# Altium PCB VatorMonitor.PcbDoc (part 2 of 2)
Units mil, origin at the board's own origin, x right, y up, seen from the top; angles counter-clockwise.
Board outline 6790 x 5680 mil, 2 copper layers (TopLayer, BottomLayer); 187 components, 167 nets, 777 pads, 179 vias.
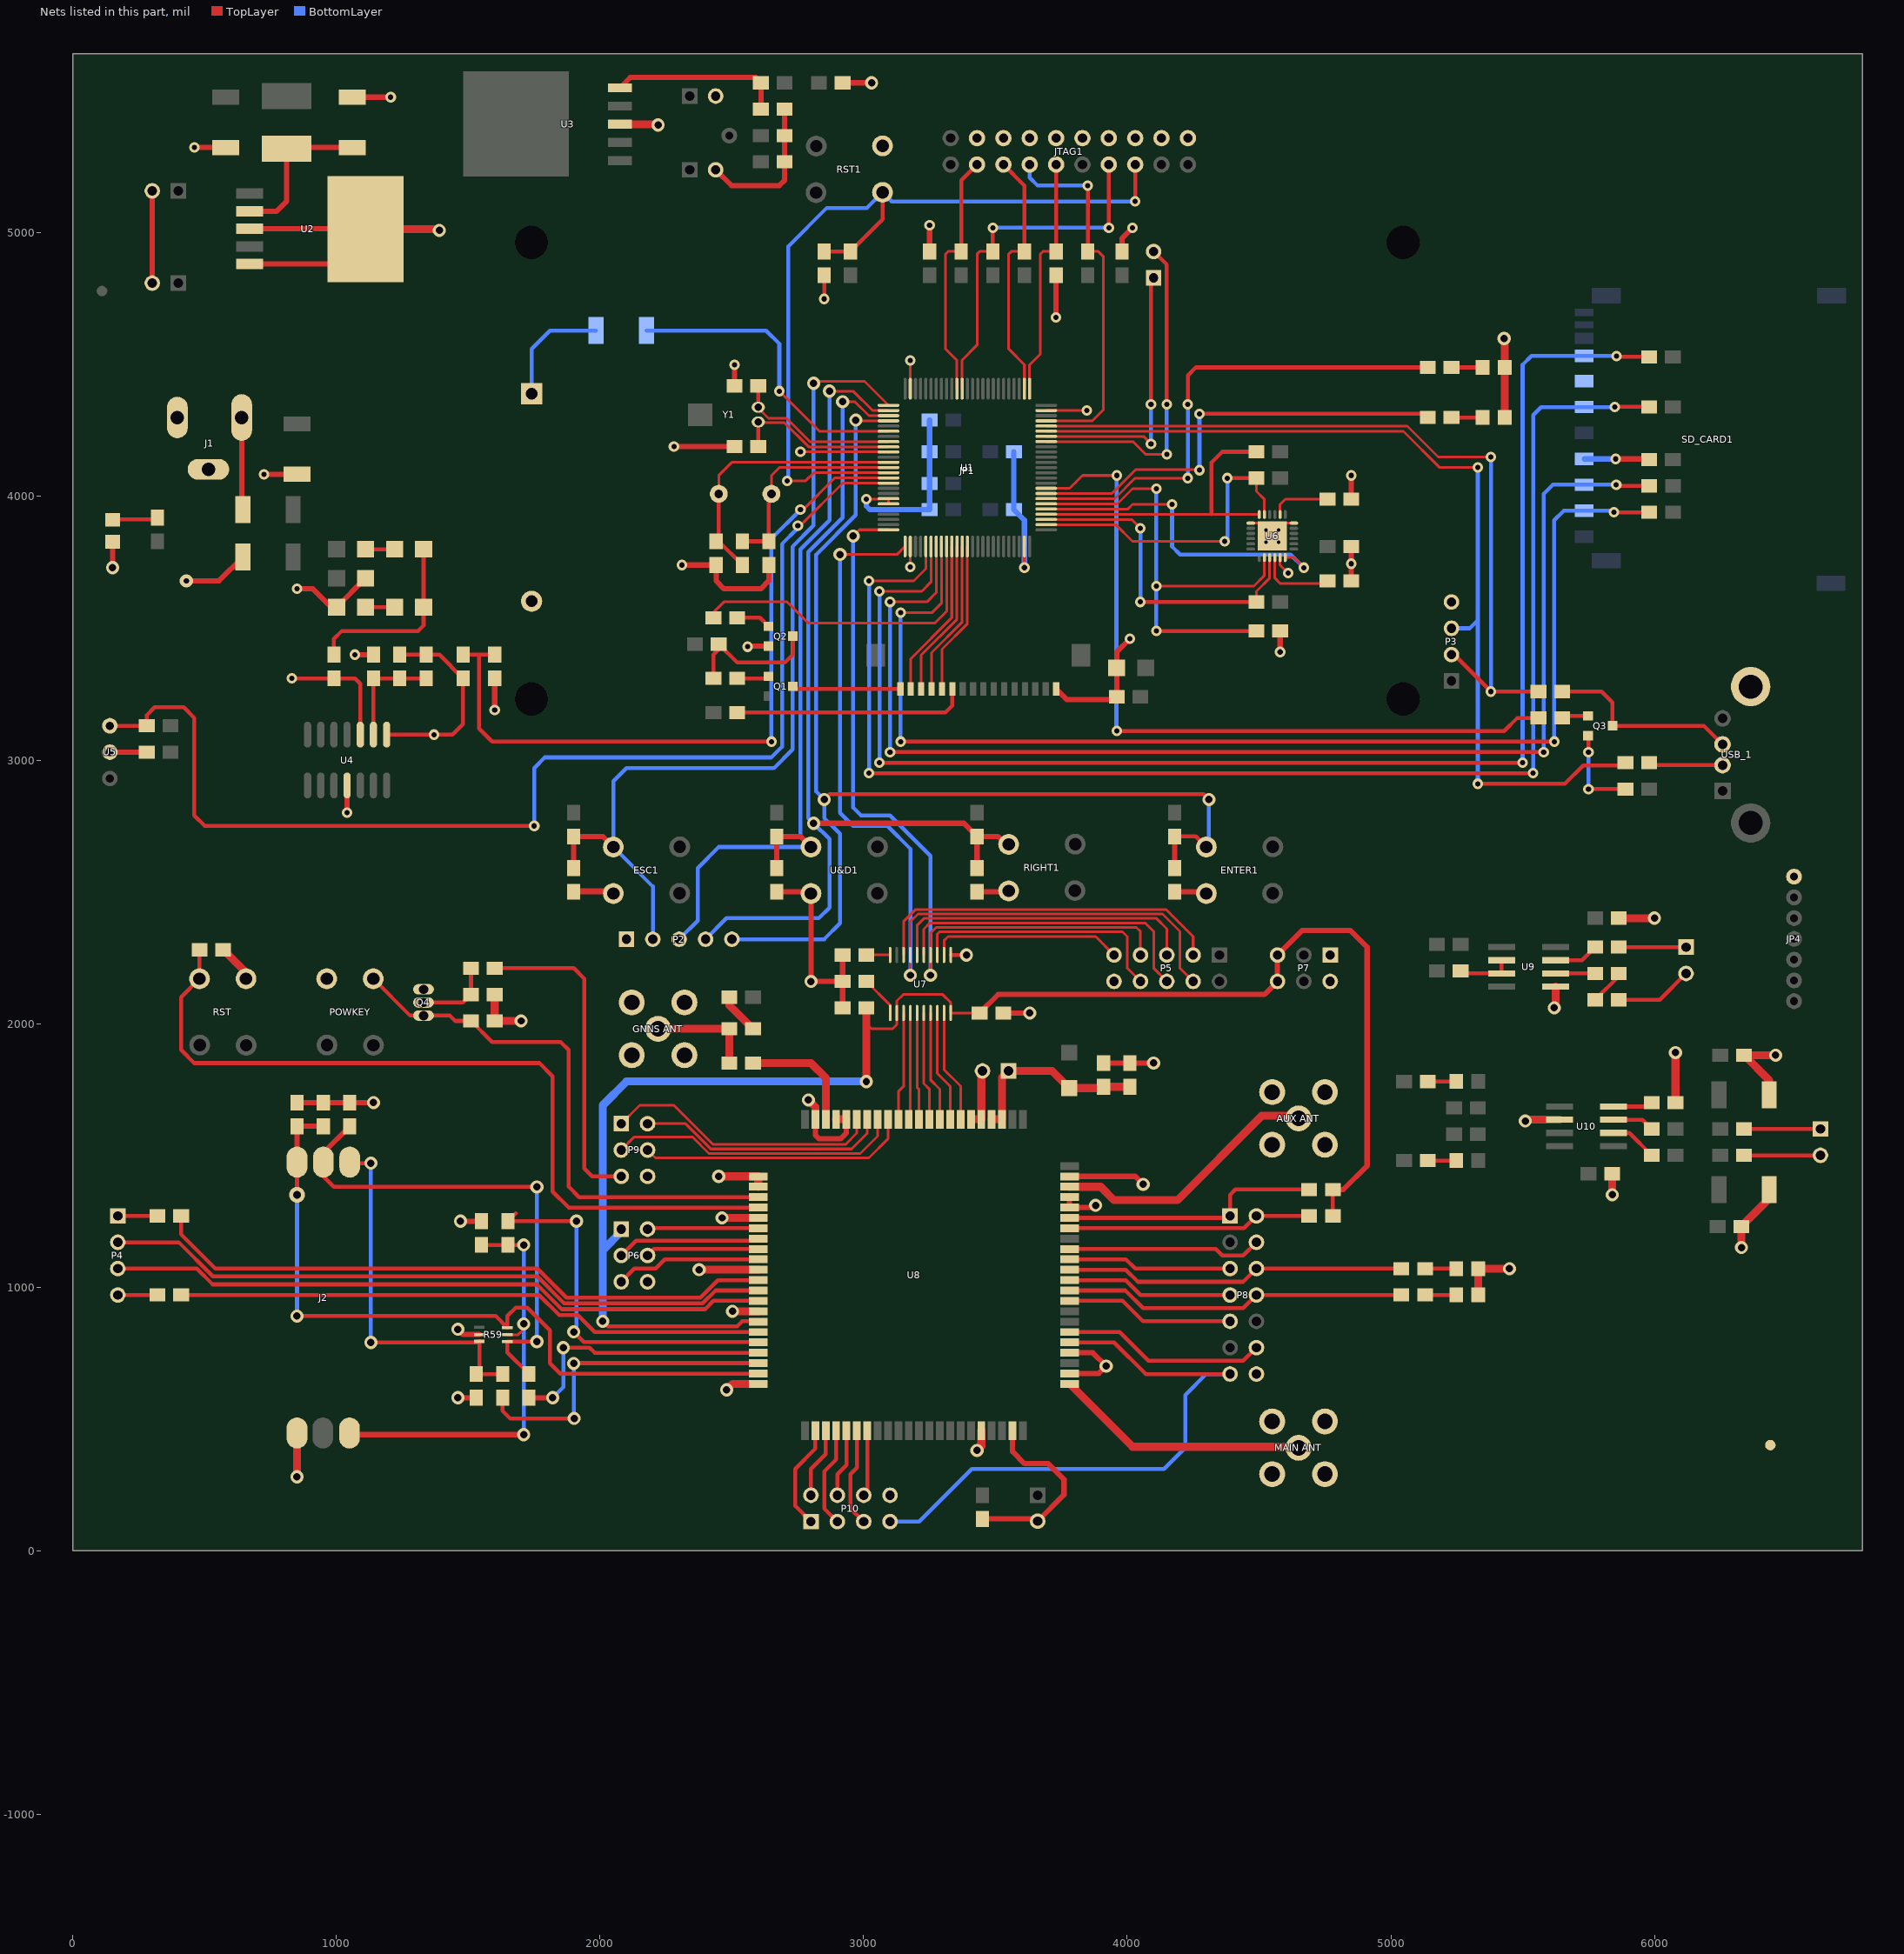
[diagram p2: the nets of this part, all layers, seen from the top]

## Via types
v1: diameter 40, hole 20, TopLayer to BottomLayer, 102 vias
v2: diameter 50, hole 28, TopLayer to BottomLayer, 66 vias
v3: diameter 25.98, hole 12.99, TopLayer to BottomLayer, 4 vias
v4: diameter 196.85, hole 118.11, TopLayer to BottomLayer, 4 vias
v5: diameter 50, hole 20, TopLayer to BottomLayer, 3 vias

## Nets (pads, with @x,y where several pads share a name; then routed paths per layer and width w, separated by ;. In a path a pad name is that pad's centre, name@x,y a point inside that pad or via, vN(x,y) a via of type N, cw(c..) or ccw(c..) an arc to the next point about the centre after c; other vN are vias at no path point) (continued)
GND: "AUX ANT.1" "AUX ANT.2" "AUX ANT.4" "AUX ANT.5" "GNNS ANT.1" "GNNS ANT.2" "GNNS ANT.4" "GNNS ANT.5" "MAIN ANT.1" "MAIN ANT.2" "MAIN ANT.4" "MAIN ANT.5" BAT1.2 C1.2 C2.2 C3.2 C4.2 C5.2 C6.2 C7.2 C8.2 C9.2 C10.1 C11.1 C12.1 C13.1 C14.2 C15.2 C16.2 C17.2 C18.2 C19.2 C20.2 C21.2 C22.2 C24.1 C25.1 C26.1 C27.1 C28.1 C29.1 C30.2 C31.1 C32.1 C33.1 C34.2 C35.2 C36.2 C38.2 C39.2 C40.2 C41.2 C42.2 C43.1 C44.1 C45.1 C46.2 C47.2 C48.1 C49.1 C50.1 C51.2 D3.1 D4.1 D5.1 D6.1 D7.2 D8.2 D9.2 D11.1 D13.1 ENTER1.2 ESC1.2 J1.2 J1.3 J2.5 JP1.1 JP4.7 JTAG1.4 JTAG1.6 JTAG1.8 JTAG1.10 JTAG1.12 JTAG1.14 JTAG1.16 JTAG1.18 JTAG1.20 LED1.2 LED2.2 P2.1 P3.4 P5.10 P6.6 P7.1 P7.2 P8.14 P9.6 P10.8 pad.1 POWKEY.2 Q2.1 Q4.1 R9.2 R12.1 R18.1 R20.1 R36.2 R42.1 R43.1 R44.1 R45.2 R49.1 R59.2 R67.2 RIGHT1.2 RST1.2 RST.1 SD_CARD1.3 SD_CARD1.6 U1.10 U1.19 U1.20 U1.27 U1.49 U1.74 U1.99 U2.3 U2.5 U2.6 U3.3 U4.11 U5.2 U6.1 U6.11 U6.18 U6.25 U7.11 U8.1 U8.2 U8.5 U8.10 U8.14 U8.37 U8.40 U8.41 U8.43 U8.57 U8.58 U8.60 U8.64 U8.65 U8.77 U8.78 U8.80 U8.81 U9.5 U10.2 U&D1.2 USB_1.5 | length 15913.5
  TopLayer w10: v1(2760,4170) 3093.11,4170 U1.10@3094.06,4169.06 ; v1(3010,3990) 3092.17,3990 U1.19@3094.06,3991.89 U1.20@3094.06,3972.2 ; v1(3176.73,3733.27) U1.27@3176.73,3810.79 ; U1.99@3176.73,4409.21 v1(3176.73,4516.73) ; v1(3609.8,3730.2) U1.49@3609.8,3810.79 ; U1.74@3692.48,4326.54 v1(3846.54,4326.54) ; U6.1@4468.31,3899.21 4500.79,3899.21 v3(4526.38,3873.62) U6.25@4550,3850 ; v3(4526.38,3826.38) U6.25@4550,3850 ; v3(4573.62,3826.38) U6.25@4550,3850 ; U6.11@4579.53,3768.31 4579.53,3740.47 v1(4610,3710) ; U6.18@4631.69,3899.21 4599.21,3899.21 U6.25@4550,3850
  TopLayer w15: v1(2560,3430) v1@2562.6,3432.6 ; v1(2850,4750) C14.2@2850,4840 ; U7.11@3330.32,2260.47 3389.53,2260.47 v2(3390,2260)
  TopLayer w20: U5.2@140,3030 C28.1@280,3030 ; v2(150,3730) D7.2@150,3828 ; C16.2@300.79,4810 C15.2@300.79,5160 ; v5(430,3680) 554.53,3680 D4.1@644.53,3770 ; v1(460,5324.53) D5.1@580,5324.53 ; U2.5@670,4882.28 977.28,4882.28 U2.6@1110,5015 1108.86,5016.14 U2.3@670,5016.14 ; v1(724.53,4084.53) D6.1@850,4084.53 ; C41.2@850,1700 C42.2@950,1700 C43.1@1050,1700 v2(1140,1700) ; v1(850,3650) 910,3650 980,3580 R18.1@1000,3580 1000.24,3580 C21.2@1110.24,3690 ; v1(1040,2800) U4.11@1040,2903.54 ; D3.1@1060,5515.47 v1(1205.47,5515.47) ; v1(1070,3400) R20.1@1140,3400 ; v2(1460,580) C45.1@1530,580 ; v2(1460,840) 1480,820 R59.2@1542,820 ; v2(1470,1250) C47.2@1550,1250 ; v1(1600,3190) C22.2@1600,3310 ; C24.1@1900,2500 2043.62,2500 ESC1.2@2050,2493.62 ; C24.1@1902.44,2502.44 ESC1.2@2043.46,2502.44 ; v1(2280,4190) C11.1@2510,4190 ; v1(2310,3740) C12.1@2440,3740 2440,3680 2470,3650 2610,3650 2640,3680 C13.1@2640,3740 ; C17.2@2438.42,5240 2498.42,5180 2680,5180 2700,5200 C19.2@2700,5270 R42.1@2700,5370 R43.1@2700,5470 ; C10.1@2510,4420 v1(2510,4500) ; v1@2562.6,3432.6 Q2.1@2638.74,3432.6 ; C25.1@2670,2500 2795.93,2500 U&D1.2@2798.37,2502.44 ; U&D1.2@2800,2493.62 v2(2800,2160) R44.1@2920,2160 ; U8.80@2816.54,1636.53 2816.54,1576.47 2830,1563 2913,1563 2934.65,1584.65 U8.77@2934.65,1636.53 ; C34.2@2920,2060 R44.1@2920,2160 ; R45.2@2920,2260 R44.1@2920,2160 ; C20.2@2920,5570 v2(3030,5570) ; R12.1@3250,4930 v1(3250,5030) ; C26.1@3430,2500 3550.84,2500 RIGHT1.2@3553.28,2502.44 ; C44.1@3450,120 3651.57,120 C46.2@3660,111.58 3760,211.58 3760,270 3700,330 3610,330 3564.57,375.43 U8.40@3564.57,455 ; C33.1@3530,2040 v2(3630,2040) ; JP1.1@3730,3270 3770,3230 3950,3230 C2.2@3960,3240 3960,3349.76 C1.2@3959.76,3350 3959.76,3409.76 v1(4010,3460) ; v1(3730,4680) R9.2@3730,4840 ; U8.41@3781.1,671.97 3891.97,671.97 v2(3920,700) 3869.29,750.71 U8.43@3781.1,750.71 ; U8.58@3781.1,1341.26 U8.57@3781.1,1301.89 3871.89,1301.89 v2(3880,1310) ; U8.60@3781.1,1420 4030,1420 v2(4060,1390) ; C38.2@3910,1850 C36.2@4010,1850 v2(4100,1850) ; C3.2@3980,4930 3980,4980 v1(4020,5020) ; C27.1@4180,2500 4305.75,2500 ENTER1.2@4308.19,2502.44 ; v1(4580,3410) R36.2@4580,3490 ; C31.1@4850,3680 v1(4850,3745) C29.1@4850,3810 ; C30.2@4850,3990 v1(4850,4080) ; v1(5852.8,4142.8) 5977.2,4142.8 C32.1@5980,4140
  TopLayer w30: C40.2@570,2280 656.38,2193.62 RST.1@656.38,2170 ; v2(850,280) J2.5@850,446 ; U2.6@1110,5015 1385,5015 v2(1390,5010) ; R49.1@1600,2110 C39.2@1600,2010 v2(1700,2010) ; U3.3@2075,5413 2217,5413 v2(2220,5410) ; v2(2375.67,1065.67) U8.10@2600,1065.67 ; v2(2450,1420) U8.1@2600,1420 U8.2@2600,1380.63 ; v2(2462.52,1262.52) U8.5@2600,1262.52 ; v2(2480,610) 2502.6,632.6 U8.81@2600,632.6 ; v2(2501.81,908.19) U8.14@2600,908.19 ; v2(2790,1710) 2816.54,1683.47 U8.80@2816.54,1636.53 ; U8.78@2895.28,1636.53 U8.77@2934.65,1636.53 ; U8.65@3407.09,1636.53 U8.64@3446.46,1636.53 3446.46,1815.67 C35.2@3450.79,1820 ; v2(3430,380) 3446.46,396.46 U8.37@3446.46,455 ; D9.2@5332,970 D8.2@5332,1070 v2(5450,1070) ; v2(5430,4600) 5432,4598 LED1.2@5432,4490 LED2.2@5432,4300 ; v2(5510,1630) 5515,1635 U10.2@5639.64,1635 ; v2(5620,2060) 5624.72,2064.72 U9.5@5624.72,2140 ; v2(5840,1350) C50.1@5840,1430 ; C48.1@5865,2400 v2(6000,2400) ; R67.2@6080,1700 v2(6080,1890) ; v2(6330,1150) C51.2@6330,1230 6435.47,1335.47 D13.1@6435.47,1370 ; D11.1@6435.47,1730 6435.47,1784.53 C49.1@6340,1880 v2(6460,1880)
  BottomLayer w15: v1@720,4080 v1(724.53,4084.53) ; v1(4610,3710) v1@4620,3700
  BottomLayer w20: v1@460,5320 v1(460,5324.53) ; v1(3010,3990) 3010,3963.78 3023.78,3950 C9.2@3250,3950 C8.2@3250,4050 C4.2@3250,4170 C7.2@3250,4290 ; C5.2@3570,4170 C6.2@3570,3950 3609.8,3910.2 v1(3609.8,3730.2) ; SD_CARD1.3@5733.71,4142.8 v1(5852.8,4142.8)
  other v3: 4573.62,3873.62
GPIO41: P8.5 U8.52 | length 623.4
  TopLayer w15: U8.52@3781.1,1105.04 3994.96,1105.04 4030,1070 P8.5@4390,1070
GPIO43: P8.7 U8.50 | length 632.2
  TopLayer w15: U8.50@3781.1,1026.3 3993.7,1026.3 4050,970 P8.7@4390,970
IRDATA: R32.2 U1.16 U5.1 | length 4534.3
  TopLayer w10: v1(2750,3890) 2760,3890 2920.94,4050.94 U1.16@3094.06,4050.94
  TopLayer w15: U5.1@140,3130 R32.2@280,3130 280,3170 310,3200 420,3200 460,3160 460,2790 500,2750 v1(1750,2750)
  BottomLayer w15: v1(1750,2750) 1750,2970 1790,3010 2650,3010 2690,3050 2690,3820 2750,3880 v1(2750,3890)
ISINK: P8.12 U8.45 | length 774.9
  TopLayer w15: U8.45@3781.1,829.45 3970.55,829.45 4080,720 4440,720 P8.12@4490,770
JTCK: JTAG1.9 R9.1 U1.76 | length 921.7
  TopLayer w10: U1.76@3629.49,4409.21 3629.49,4500 3670,4540.51 3670,4920 3680,4930 R9.1@3730,4930
  TopLayer w15: R9.1@3730,4930 JTAG1.9@3730,5260
JTDI: JTAG1.5 R6.1 U1.77 | length 962.8
  TopLayer w10: U1.77@3609.8,4409.21 3609.8,4500.2 3550,4560 3550,4920 3560,4930 R6.1@3610,4930
  TopLayer w15: JTAG1.5@3530,5260 3610,5180 R6.1@3610,4930
JTDO: JTAG1.13 R8.1 U1.89 | length 1368.3
  TopLayer w10: U1.89@3373.58,4409.21 3373.58,4518.22 3430,4574.64 3430,4920 3440,4930 R8.1@3490,4930
  TopLayer w15: R8.1@3490,4930 v1(3490,5020) ; v1(3930,5020) JTAG1.13@3930,5260
  BottomLayer w15: v1(3490,5020) v1(3930,5020)
JTMS: JTAG1.7 R7.1 U1.72 | length 1416
  TopLayer w10: U1.72@3692.48,4287.17 3867.17,4287.17 3910,4330 3910,4910 3890,4930 R7.1@3850,4930
  TopLayer w15: R7.1@3850,4930 v1(3850,5180)
  BottomLayer w15: JTAG1.7@3630,5260 3630,5210 3660,5180 v1(3850,5180)
JTRST: JTAG1.3 R5.1 U1.90 | length 948
  TopLayer w10: U1.90@3353.9,4409.21 3353.9,4516.1 3310,4560 3310,4920 3320,4930 R5.1@3370,4930
  TopLayer w15: R5.1@3370,4930 3370,5200 JTAG1.3@3430,5260
KEY1: C24.2 ESC1.1 P2.2 R26.2 U1.1 | length 3426.1
  TopLayer w10: v2(2810,4430) 2817,4437 3003.28,4437 U1.1@3094.06,4346.22
  TopLayer w20: C24.2@1900,2590 R26.2@1900,2710 2010,2710 ESC1.1@2050,2670
  BottomLayer w15: P2.2@2200,2320 2200,2520 ESC1.1@2050,2670 2050,2920 2100,2970 2660,2970 2730,3040 2730,3810 2810,3890 v2(2810,4430)
KEY2: C25.2 P2.3 R27.2 U1.2 U&D1.1 | length 3075.3
  TopLayer w10: v2(2870,4400) 2960,4400 3033.46,4326.54 U1.2@3094.06,4326.54
  TopLayer w20: C25.2@2670,2590 R27.2@2670,2710 2760,2710 U&D1.1@2800,2670
  BottomLayer w15: P2.3@2300,2320 2370,2390 2370,2590 2450,2670 U&D1.1@2800,2670 2760,2710 2760,3800 2870,3910 v2(2870,4400)
KEY3: C26.2 P2.4 R28.2 RIGHT1.1 U1.3 | length 3620
  TopLayer w10: v2(2920,4360) 2966.66,4360 3019.81,4306.85 U1.3@3094.06,4306.85
  TopLayer w20: v2(2810,2760) 3380,2760 R28.2@3430,2710 ; C26.2@3430,2590 R28.2@3430,2710 ; RIGHT1.1@3550,2670 3510,2710 R28.2@3430,2710
  BottomLayer w15: P2.4@2400,2320 2480,2400 2830,2400 2870,2440 2870,2700 v2(2810,2760) 2790,2780 2790,3790 2920,3920 v2(2920,4360)
KEY4: C27.2 ENTER1.1 P2.5 R29.2 U1.4 | length 4492.4
  TopLayer w10: v2(2970,4290) 2975.67,4290 2972.83,4287.17 U1.4@3094.06,4287.17
  TopLayer w15: v2(2850,2850) 2870,2870 4290,2870 v2(4310,2850) ; R29.2@4180,2710 4260,2710 ENTER1.1@4300,2670
  TopLayer w20: C27.2@4180,2590 R29.2@4180,2710
  BottomLayer w15: P2.5@2500,2320 2850,2320 2910,2380 2910,2720 2850,2780 v2(2850,2850) 2820,2880 2820,3780 2970,3930 v2(2970,4290) ; ENTER1.1@4300,2670 4310,2680 v2(4310,2850)
LCD_BL: R4.2 U1.34 | length 1218.9
  TopLayer w10: R4.2@2430,3540 2430,3560 2470,3600 2710,3600 2790,3520 3270,3520 3314.53,3564.53 U1.34@3314.53,3810.79
LCD_CS: JP1.15 U1.35 | length 605.2
  TopLayer w10: JP1.15@3178.82,3270 3178.82,3384.61 3334.21,3540 U1.35@3334.21,3810.79
LCD_DC: JP1.13 U1.37 | length 588.8
  TopLayer w10: JP1.13@3257.56,3270 3257.56,3407.56 3373.58,3523.58 U1.37@3373.58,3810.79
LCD_RST: JP1.14 U1.36 | length 597
  TopLayer w10: JP1.14@3218.19,3270 3218.19,3398.19 3353.9,3533.9 U1.36@3353.9,3810.79
LCD_WR: JP1.12 U1.38 | length 580.7
  TopLayer w10: JP1.12@3296.93,3270 3296.93,3420.97 3393.27,3517.31 U1.38@3393.27,3810.79
LED1: R30.2 U1.57 | length 1882.3
  TopLayer w10: U1.57@3692.48,3991.89 3951.89,3991.89 4030,4070 v1(4230,4070)
  TopLayer w15: v1(4230,4350) 4230,4460 4260,4490 R30.2@5140,4490
  BottomLayer w15: v1(4230,4070) v1(4230,4350)
LED2: R31.2 U1.58 | length 1705.6
  TopLayer w10: U1.58@3692.48,4011.57 3941.57,4011.57 4032,4102 4272,4102 v1(4274,4100)
  TopLayer w15: v1(4274,4314) 5126,4314 R31.2@5140,4300
  BottomLayer w15: v1(4274,4100) v1(4274,4314)
M_CTS: P5.8 U7.13 | length 1001.4
  TopLayer w10: U7.13@3279.13,2260.47 3279.13,2339.13 3288,2348 3982,2348 4000,2330 4000,2210 P5.8@4050,2160
M_DCD: P5.5 U7.16 | length 1186.7
  TopLayer w10: U7.16@3202.36,2260.47 3202.36,2372.36 3229,2399 4111,2399 4150,2360 P5.5@4150,2260
M_DTR: P5.3 U7.18 | length 1357.1
  TopLayer w10: U7.18@3151.18,2260.47 3151.18,2387.14 3197.04,2433 4147,2433 4250,2330 P5.3@4250,2260
M_RI: P5.6 U7.15 | length 1203.5
  TopLayer w10: U7.15@3227.95,2260.47 3227.95,2357.95 3252,2382 4068,2382 4100,2350 4100,2210 P5.6@4150,2160
M_RTS: P5.9 U7.12 | length 734.9
  TopLayer w10: U7.12@3304.72,2260.47 3304.72,2314.72 3320,2330 3880,2330 P5.9@3950,2260
M_RXD: P5.7 U1.25 U7.14 | length 3055.3
  TopLayer w10: v2(2960,3850) 2983.78,3873.78 U1.25@3094.06,3873.78 ; v2@3253.54,2186.46 U7.14@3253.54,2260.47 3253.54,2343.54 3275,2365 4035,2365 4050,2350 P5.7@4050,2260
  BottomLayer w15: v2(2960,3850) 2960,2820 2990,2790 3100,2790 3253.54,2636.46 v2(3253.54,2183.23)
M_TXD: P5.4 U1.26 U7.17 | length 3520.2
  TopLayer w10: v2(2910,3780) 3126.26,3780 U1.26@3157.05,3810.79 ; v2(3176.77,2183.23) U7.17@3176.77,2260.47 3176.77,2386.77 3206,2416 4134,2416 4200,2350 4200,2210 P5.4@4250,2160
  BottomLayer w15: v2(2910,3780) 2910,2800 2960,2750 3090,2750 3176.77,2663.23 v2(3176.77,2183.23)
MPU6000_C\S\: R36.1 U1.56 U6.8 | length 1856.5
  TopLayer w10: U1.56@3692.48,3972.2 3962.2,3972.2 4020,4030 v1(4110,4030) ; v1(4110,3660) 4480,3660 4520.47,3700.47 U6.8@4520.47,3768.31
  TopLayer w15: v1(4110,3490) R36.1@4490,3490
  BottomLayer w15: v1(4110,3490) v1(4110,3660) v1(4110,4030)
MPU6000_CLK: R35.2 U1.52 U6.23 | length 1208.9
  TopLayer w10: U1.52@3692.48,3893.46 3956.54,3893.46 4020,3830 v1(4370,3830) ; R35.2@4490,4070 4490,4020 4520.47,3989.53 U6.23@4520.47,3931.69
  TopLayer w15: v1(4380,4070) R35.2@4490,4070
  BottomLayer w15: v1(4370,3830) 4380,3840 v1(4380,4070)
MPU6000_INT: U1.55 U6.12 | length 1264.6
  TopLayer w10: U1.55@3692.48,3952.52 4002.52,3952.52 4020,3970 v1(4170,3970) ; U6.12@4599.21,3768.31 4631.69,3768.31 v1(4670,3730)
  BottomLayer w15: v1(4170,3970) 4170,3810 4200,3780 4620,3780 v1(4670,3730)
MPU6000_MISO: R33.2 U1.53 U6.9 | length 1280.3
  TopLayer w10: U1.53@3692.48,3913.15 4016.85,3913.15 v1(4050,3880) ; R33.2@4490,3600 4490,3640 4540.16,3690.16 U6.9@4540.16,3768.31
  TopLayer w15: v1(4050,3600) R33.2@4490,3600
  BottomLayer w15: v1(4050,3600) v1(4050,3880)
MPU6000_MOSI: R34.2 U1.54 U6.24 | length 1190.9
  TopLayer w10: U1.54@3692.48,3932.83 4320,3932.83 U6.24@4499.65,3932.83
  TopLayer w15: 4320,3932.83 4320,4130 4360,4170 R34.2@4490,4170
NET: P8.6 R56.1 U8.51 | length 1298.5
  TopLayer w15: U8.51@3781.1,1065.67 3994.33,1065.67 4040,1020 4440,1020 P8.6@4490,1070 R56.1@5040,1070
"NetAUX ANT_3": "AUX ANT.3" U8.59 | length 1026.6
  TopLayer w30: U8.59@3781.1,1380.63 3899.37,1380.63 3950,1330 4190,1330 4510,1650 4640,1650 4650,1640
NetBAT1_1: BAT1.1 D1.1 | length 443.5
  BottomLayer w15: BAT1.1@1740,4390 1740,4560 1810,4630 D1.1@1984.53,4630
NetC23_1: C23.1 R20.2 R21.1 U4.2 | length 413.5
  TopLayer w15: U4.2@1140,3096.46 R20.2@1140,3310 C23.1@1240,3310 R21.1@1340,3310
NetC23_2: C23.2 R16.1 R21.2 U4.1 | length 757.4
  TopLayer w15: U4.1@1190,3096.46 v1(1370,3096.46) 1440,3096.46 1480,3136.46 R16.1@1480,3310 1390,3400 R21.2@1340,3400 C23.2@1240,3400
NetC30_1: C30.1 U6.20 | length 226.8
  TopLayer w10: U6.20@4579.53,3931.69 4579.53,3969.53 4600,3990 C30.1@4760,3990
NetC31_2: C31.2 U6.10 | length 290.8
  TopLayer w10: U6.10@4559.84,3768.31 4559.84,3690.16 4580,3670 4750,3670 C31.2@4760,3680
NetC35_1: C35.1 C36.1 C38.1 R47.2 U8.62 U8.63 | length 722.6
  TopLayer w15: C38.1@3905,1755 C38.1@3910,1760
  TopLayer w30: U8.63@3485.83,1636.53 U8.62@3525.2,1636.53 3525.2,1795.99 C35.1@3549.21,1820 3715,1820 R47.2@3780,1755 C38.1@3905,1755 ; C38.1@3910,1760 C36.1@4010,1760
NetC37_1: "GNNS ANT.3" C37.1 L2.2 | length 400
  TopLayer w30: 2220,1980 L2.2@2490,1980 C37.1@2490,1850
NetC37_2: C37.2 U8.79 | length 456.6
  TopLayer w30: C37.2@2580,1850 2800,1850 2855.9,1794.09 U8.79@2855.9,1636.53
NetC39_1: C39.1 POWKEY.1 Q4.3 U8.3 | length 2107.9
  TopLayer w15: POWKEY.1@1139.21,2170 1279.21,2030 Q4.3@1330,2030 1430,2030 1450,2010 C39.1@1510,2010 1590,1930 1850,1930 1880,1900 1880,1381.26 1920,1341.26 U8.3@2600,1341.26
NetC40_1: C40.1 RST.2 U8.4 | length 3103.5
  TopLayer w15: C40.1@480,2280 RST.2@480,2170 410,2100 410,1900 460,1850 1770,1850 1820,1800 1820,1361.89 1880,1301.89 2446.03,1301.89 2446.16,1302.02 2599.87,1302.02 U8.4@2600,1301.89
NetC43_2: C43.2 J2.2 R54.2 R59.4 | length 1963.2
  TopLayer w15: J2.2@950,1474 950,1420 990,1380 v2(1760,1380) ; R54.2@1730,670 1648,752 R59.4@1648,793 v2(1760,793)
  TopLayer w20: J2.2@950,1474 950,1510 C43.2@1050,1610
  BottomLayer w10: v2(1760,1380) 1760,1384 v2@1767,1391 ; v2@1767,1380 v2@1767,1391 ; v2@1767,1391 1770,1394 1767,1397 v2@1767,1391
  BottomLayer w15: v2(1760,793) 1767,793 1760,800 v2(1760,1380)
NetC45_2: C45.2 J2.3 R55.2 R59.3 | length 1404.3
  TopLayer w10: J2.3@1050,1474 J2.3@1054,1470 ; C45.2@1530,670 C45.2@1542,682 ; R59.3@1538,790 R59.3@1542,794
  TopLayer w15: J2.3@1054,1470 v2(1130,1470) ; v2(1130,790) R59.3@1538,790 ; C45.2@1530,670 R55.2@1630,670 ; C45.2@1542,682 R59.3@1542,794
  BottomLayer w15: v2(1130,790) v2(1130,1470)
NetC47_1: C47.1 J2.7 R57.2 R59.5 | length 1634.2
  TopLayer w10: R59.5@1648,819 1689,819 1710,840 v2(1710,860)
  TopLayer w15: C47.1@1550,1160 R57.2@1650,1160 v2(1710,1160)
  TopLayer w20: J2.7@1049,446 1055,440 v2(1710,440)
  BottomLayer w15: v2(1710,440) v2(1710,860) v2(1710,1160)
NetD2_1: D2.1 J1.1 | length 351.9
  TopLayer w20: J1.1@640,4300 640,3954.53 D2.1@644.53,3950
NetD3_2: D3.2 L1.1 U2.2 | length 557.2
  TopLayer w20: U2.2@670,5083.07 773.07,5083.07 810,5120 L1.1@810,5320 814.53,5324.53 D3.2@1010,5324.53
NetD7_1: D7.1 R17.2 | length 163.8
  TopLayer w15: D7.1@150,3913.81 R17.2@313.82,3913.81
NetD8_1: D8.1 R56.2 | length 118
  TopLayer w15: R56.2@5130,1070 D8.1@5248,1070
NetD9_1: D9.1 R58.2 | length 118
  TopLayer w15: R58.2@5130,970 D9.1@5248,970
NetD10_1: D10.1 R66.1 | length 108
  TopLayer w15: R66.1@5140,1780 D10.1@5248,1780
NetD12_1: D12.1 R72.1 | length 108
  TopLayer w15: R72.1@5140,1480 D12.1@5248,1480
NetJP1_11: JP1.11 R1.1 | length 890.9
  TopLayer w15: R1.1@2520,3180 3310,3180 3336.3,3206.3 JP1.11@3336.3,3270
NetJP1_16: JP1.16 Q1.3 | length 412.3
  TopLayer w15: Q1.3@2731.26,3280 2741.26,3270 JP1.16@3139.45,3270
NetJP7_1: JP7.1 R68.1 | length 290
  TopLayer w15: R68.1@6340,1600 JP7.1@6630,1600
NetJP7_2: JP7.2 R71.1 | length 290
  TopLayer w15: R71.1@6340,1500 JP7.2@6630,1500
NetL2_1: L2.1 R46.1 | length 157.3
  TopLayer w30: R46.1@2490,2100 2490,2070 L2.1@2580,1980
NetLED1_1: LED1.1 R30.1 | length 116.2
  TopLayer w15: R30.1@5230,4490 LED1.1@5346.18,4490
NetLED2_1: LED2.1 R31.1 | length 116.2
  TopLayer w15: R31.1@5230,4300 LED2.1@5346.18,4300
"NetMAIN ANT_3": "MAIN ANT.3" U8.82 | length 969.4
  TopLayer w30: U8.82@3781.1,632.6 4020,393.7 4646.3,393.7 4650,390
NetQ1_2: Q1.2 R3.1 | length 111.3
  TopLayer w15: R3.1@2520,3310 Q1.2@2631.34,3310
NetQ2_2: Q2.2 R4.1 | length 132.2
  TopLayer w15: R4.1@2520,3540 2606.14,3540 Q2.2@2638.74,3507.4
NetQ2_3: Q2.3 R2.1 R3.2 | length 531
  TopLayer w15: R3.2@2430,3310 2430,3400 2450,3420 R2.1@2450,3440 2520,3370 2701.26,3370 2731.26,3400 Q2.3@2731.26,3470
NetQ3_1: Q3.1 R22.2 | length 343.1
  TopLayer w15: Q3.1@5748.74,3092.6 5750,3091.34 v1(5750,3030) ; v1(5750,2890) R22.2@5890,2890
  BottomLayer w15: v1(5750,2890) v1(5750,3030)
NetQ3_2: Q3.2 R23.2 | length 101.8
  TopLayer w15: R23.2@5650,3160 5657.4,3167.4 Q3.2@5748.74,3167.4
NetQ3_3: Q3.3 R25.1 USB_1.3 | length 743.7
  TopLayer w15: R25.1@5650,3260 5800,3260 5841.26,3218.74 Q3.3@5841.26,3130 6187.95,3130 USB_1.3@6258.58,3059.37
NetQ4_2: Q4.2 R48.2 R49.2 | length 292.4
  TopLayer w15: Q4.2@1330,2080 1480,2080 R49.2@1510,2110 R48.2@1510,2210
NetR13_2: R13.2 R14.1 | length 109.8
  TopLayer w15: R13.2@1110.24,3800 R14.1@1220,3800
NetR14_2: R14.2 R15.1 R19.2 | length 710.8
  TopLayer w15: R15.1@990,3400 990,3460 1020,3490 1310,3490 1330.24,3510.24 R19.2@1330.24,3580 R14.2@1330.24,3800
NetR15_2: R15.2 U4.3 | length 461.8
  TopLayer w15: v1(830,3310) R15.2@990,3310 1070,3310 1090,3290 U4.3@1090,3096.46
NetR18_2: R18.2 R19.1 | length 109.8
  TopLayer w15: R18.2@1110.24,3580 R19.1@1220,3580
NetR24_1: R24.1 USB_1.2 | length 282.5
  TopLayer w15: R24.1@5980,2990 5989.37,2980.63 USB_1.2@6258.58,2980.63
NetR41_1: R41.1 R43.2 U3.5 | length 659.4
  TopLayer w20: U3.5@2075,5551 2114,5590 2590,5590 R41.1@2610,5570 R43.2@2610,5470
NetR44_2: R44.2 U7.1 | length 157.3
  TopLayer w10: R44.2@3010,2160 3100,2070 U7.1@3100,2040
NetR45_1: R45.1 U7.20 | length 90.2
  TopLayer w10: R45.1@3010,2260 3010.47,2260.47 U7.20@3100,2260.47
NetR50_2: R50.2 U8.11 | length 2386.9
  TopLayer w15: R50.2@410,1270 410,1200 540,1070 1762.23,1070 1872.23,960 2380,960 2446.3,1026.3 U8.11@2600,1026.3
NetR53_2: R53.2 U8.16 | length 2261.7
  TopLayer w15: R53.2@419.45,979.45 R53.2@410,970 1768.89,970 1844.89,894 1915.32,894 1980,829.32 2599.87,829.32 U8.16@2600,829.45
NetR61_2: R61.2 U9.7 | length 171
  TopLayer w15: U9.7@5624.72,2240 5725,2240 R61.2@5775,2290
NetR62_2: R62.2 U9.2 U9.3 | length 209.1
  TopLayer w15: R62.2@5265,2200 5275,2190 U9.3@5420,2190 U9.2@5420,2240
NetR64_2: R64.2 R65.1 | length 137.3
  TopLayer w15: R64.2@5775,2090 5865,2180 R65.1@5865,2190
NetR65_2: R65.2 U9.6 | length 150.3
  TopLayer w15: U9.6@5624.72,2190 R65.2@5775,2190
NetR67_1: R67.1 U10.8 | length 151.9
  TopLayer w15: U10.8@5844.36,1685 5975,1685 R67.1@5990,1700
NetR69_1: R69.1 U10.7 | length 160.1
  TopLayer w15: U10.7@5844.36,1635 5955,1635 R69.1@5990,1600
NetR70_1: R70.1 U10.6 | length 180.8
  TopLayer w15: U10.6@5844.36,1585 5905,1585 R70.1@5990,1500
OSC32_IN: C10.2 U1.8 Y1.2 | length 630.9
  TopLayer w10: Y1.2@2600,4336 2639,4297 2707.04,4297 2795.62,4208.43 U1.8@3094.06,4208.43
  TopLayer w15: Y1.2@2600,4336 Y1.2@2600,4339 C10.2@2600,4420
OSC32_OUT: C11.2 U1.9 Y1.1 | length 621.9
  TopLayer w10: Y1.1@2600,4280 2700,4280 2791.26,4188.74 U1.9@3094.06,4188.74
  TopLayer w15: C11.2@2600,4190 Y1.1@2600,4280
OSC_IN: C12.2 R10.2 U1.12 Y2.1 | length 1056.1
  TopLayer w10: Y2.1@2450,4010 2450,4080 2499.69,4129.69 U1.12@3094.06,4129.69
  TopLayer w15: Y2.1@2450,4010 2450,3840 C12.2@2440,3830 2450,3830 R10.2@2540,3740
OSC_OUT: C13.2 R10.1 U1.13 Y2.2 | length 810.6
  TopLayer w10: Y2.2@2650,4010 2650,4080 2680,4110 U1.13@3094.06,4110
  TopLayer w15: R10.1@2540,3830 C13.2@2640,3830 2640,4000 Y2.2@2650,4010
PCM_CLK: P9.1 U8.76 | length 1055.1
  TopLayer w10: P9.1@2080,1620 2150,1690 2280,1690 2429,1541 2931,1541 2974.02,1584.02 U8.76@2974.02,1636.53
PCM_IN: P9.3 U8.74 | length 1110.6
  TopLayer w10: P9.3@2080,1520 2130,1570 2350,1570 2413,1507 2987,1507 3052.76,1572.76 U8.74@3052.76,1636.53
PCM_OUT: P9.4 U8.73 | length 1028.8
  TopLayer w10: P9.4@2180,1520 2210,1490 3020,1490 3092.13,1562.13 U8.73@3092.13,1636.53
PCM_SY: P9.2 U8.75 | length 950.9
  TopLayer w10: P9.2@2180,1620 2324.04,1620 2420.04,1524 2954,1524 3013.39,1583.39 U8.75@3013.39,1636.53
PWR_KEY: P9.5 R48.1 | length 1229
  TopLayer w15: R48.1@1600,2210 1900,2210 1940,2170 1940,1450 1970,1420 P9.5@2080,1420
RESET: C14.1 JTAG1.15 R11.1 RST1.1 U1.14 | length 3217.7
  TopLayer w10: v1(2710,4060) 2780,4060 2810.32,4090.32 U1.14@3094.06,4090.32
  TopLayer w15: C14.1@2850,4930 R11.1@2950,4930 3071.58,5051.58 RST1.1@3071.58,5154.41 ; v1(4030,5120) JTAG1.15@4030,5260
  BottomLayer w15: v1(2710,4060) 2714.5,4064.5 2714.5,4950 2860,5095.5 3012.67,5095.5 RST1.1@3071.58,5154.41 3105.99,5120 v1(4030,5120)
RS232_RX: P1.1 U1.69 | length 1064.5
  TopLayer w10: U1.69@3692.48,4228.11 4061.89,4228.11 v1(4090,4200)
  TopLayer w15: v1(4090,4350) 4090,4820 P1.1@4100,4830
  BottomLayer w15: v1(4090,4200) v1(4090,4350) ; P1.1@4105,4825 P1.1@4120,4840
RS232_TX: P1.2 U1.68 | length 1268.3
  TopLayer w10: U1.68@3692.48,4208.43 4021.57,4208.43 4070,4160 v1(4150,4160)
  TopLayer w15: P1.2@4100,4930 4150,4880 v1(4150,4350)
  BottomLayer w15: v1(4150,4160) v1(4150,4350)
RT+: JP5.2 R64.1 | length 296.4
  TopLayer w15: R64.1@5865,2090 6020,2090 JP5.2@6120,2190
RT-: JP5.1 R61.1 | length 255
  TopLayer w15: R61.1@5865,2290 JP5.1@6120,2290
S_CTS: U7.8 U8.67 | length 423.8
  TopLayer w10: U7.8@3279.13,2040 3279.13,1810.87 3328.35,1761.65 U8.67@3328.35,1636.53
S_DCD: U7.5 U8.70 | length 406.7
  TopLayer w10: U7.5@3202.36,2040 3202.36,1757.64 3210.24,1749.76 U8.70@3210.24,1636.53
S_DTR: U7.3 U8.72 | length 411.6
  TopLayer w10: U8.72@3131.5,1636.53 3131.5,1741.5 3151.18,1761.18 U7.3@3151.18,2040
S_RI: U7.6 U8.69 | length 412.4
  TopLayer w10: U7.6@3227.95,2040 3227.95,1772.05 3249.61,1750.39 U8.69@3249.61,1636.53
S_RTS: U7.9 U8.66 | length 429.6
  TopLayer w10: U7.9@3304.72,2040 3304.72,1825.28 3367.72,1762.28 U8.66@3367.72,1636.53
S_RXD: U7.7 U8.68 | length 418.1
  TopLayer w10: U7.7@3253.54,2040 3253.54,1786.46 3288.98,1751.02 U8.68@3288.98,1636.53
S_TXD: U7.4 U8.71 | length 405.9
  TopLayer w10: U8.71@3170.87,1636.53 3176.77,1642.44 U7.4@3176.77,2040
SCL: P8.2 R52.1 U8.55 | length 928.3
  TopLayer w15: U8.55@3781.1,1223.15 4443.15,1223.15 P8.2@4490,1270 R52.1@4690,1270
SD1_DET: P8.9 U8.48 | length 641
  TopLayer w15: U8.48@3781.1,947.56 3982.44,947.56 4060,870 P8.9@4390,870
SD_CLK: P10.6 U8.26 | length 250.5
  TopLayer w15: P10.6@3000,210 3013.39,223.39 U8.26@3013.39,455
SD_CMD: P10.1 U8.21 | length 401.6
  TopLayer w15: P10.1@2800,110 2740,170 2740,310 2816.54,386.53 U8.21@2816.54,455
SD_DA1: P10.2 U8.22 | length 268.2
  TopLayer w15: P10.2@2800,210 2800,310 2855.9,365.9 U8.22@2855.9,455
SD_DA2: P10.3 U8.23 | length 384.5
  TopLayer w15: U8.23@2895.28,455 2895.28,345.28 2850,300 2850,160 P10.3@2900,110
SD_DA3: P10.4 U8.24 | length 259.4
  TopLayer w15: P10.4@2900,210 2900,290 2934.65,324.65 U8.24@2934.65,455
SD_DA4: P10.5 U8.25 | length 375.7
  TopLayer w15: U8.25@2974.02,455 2974.02,314.02 2950,290 2950,160 P10.5@3000,110
SDA: P8.1 R51.1 U8.56 | length 1000.3
  TopLayer w15: U8.56@3781.1,1262.52 4382.52,1262.52 P8.1@4390,1270 4390,1350 4410,1370 R51.1@4690,1370
SIM_SPI_CLK: P6.2 U8.6 | length 421.4
  TopLayer w15: P6.2@2180,1220 2183.15,1223.15 2446.03,1223.15 2446.16,1223.02 2599.87,1223.02 U8.6@2600,1223.15
SIM_SPI_CS: P6.5 U8.9 | length 555.3
  TopLayer w15: P6.5@2080,1020 2130,1070 2210,1070 2245.17,1105.17 2599.87,1105.17 U8.9@2600,1105.04
SIM_SPI_MI: P6.3 U8.7 | length 551
  TopLayer w15: P6.3@2080,1120 2135.97,1175.97 2600,1175.97 U8.7@2600,1183.78
SIM_SPI_MO: P6.4 U8.8 | length 430.1
  TopLayer w15: P6.4@2180,1120 2204.41,1144.41 U8.8@2600,1144.41
SIMCLK: R55.1 U8.19 | length 1243
  TopLayer w15: R55.1@1630,580 1630,530 1658.66,501.34 v2(1901.34,501.34) ; v2(1900,710) 1901.34,711.34 U8.19@2600,711.34
  BottomLayer w15: v2(1900,710) 1900,502.68 v2(1901.34,501.34)
SIMDATA: R57.1 U8.17 | length 1443.2
  TopLayer w15: 1680.08,1280.08 R57.1@1650,1250 v2(1910,1250) ; v2(1900,830) 1938,792 2598.08,792 U8.17@2600,790.08
  BottomLayer w15: v2(1900,830) 1910,840 v2(1910,1250)
SIMRST: R54.1 U8.18 | length 1494.6
  TopLayer w15: v2(1860,770) 1960,770 1979.16,750.84 2599.87,750.84 U8.18@2600,750.71 2150,750.71
  TopLayer w20: R54.1@1730,580 v2(1820,580)
  BottomLayer w15: v2(1820,580) 1860,620 v2(1860,770)
SIMVCC: C41.1 C42.1 J2.1 pad.3 R59.6 U8.20 | length 2804
  TopLayer w15: v2(850,890) 1604,890 R59.6@1648,846 1648,890 1680,922 1723.86,922 1810,835.86 1810,710 1849.5,670.5 2598.53,670.5 U8.20@2600,671.97 ; pad.3@850,1370 J2.1@850,1474
  TopLayer w20: J2.1@850,1474 C41.1@850,1610 C42.1@950,1610
  BottomLayer w15: v2(850,890) pad.3@850,1350
SPI_C\S\: R37.1 SD_CARD1.1 U1.33 | length 4573.5
  TopLayer w10: v1(3140,3560) 3260,3560 3294.84,3594.84 U1.33@3294.84,3810.79
  TopLayer w15: v1(3140,3070) v1(5620,3070) ; v1(5846.14,3940.47) R37.1@5980.55,3940.47
  BottomLayer w15: v1(3140,3070) v1(3140,3560) ; v1(5620,3070) 5620,3910 5656.61,3946.61 SD_CARD1.1@5733.35,3946.61 5840,3946.61 v1(5846.14,3940.47)
SPI_CLK: R39.1 SD_CARD1.5 U1.30 | length 5382
  TopLayer w10: v1(3020,3680) 3190,3680 3235.79,3725.79 U1.30@3235.79,3810.79
  TopLayer w15: v1(3020,2950) v1(5540,2950) ; v1(5849.65,4339.65) 5850,4340 R39.1@5980,4340
  BottomLayer w15: v1(3020,2950) v1(3020,3680) ; v1(5540,2950) 5540,4309.65 5570,4339.65 SD_CARD1.5@5733.71,4339.65 v1(5849.65,4339.65)
SPI_DI: R38.1 SD_CARD1.2 U1.32 | length 4812
  TopLayer w10: v1(3100,3600) 3240,3600 3275.16,3635.16 U1.32@3275.16,3810.79
  TopLayer w15: v1(3100,3030) v1(5580,3030) ; v1(5855.39,4044.61) 5859.53,4040.47 R38.1@5980.55,4040.47
  BottomLayer w15: v1(3100,3030) v1(3100,3600) ; v1(5580,3030) 5580,4010 5614.61,4044.61 SD_CARD1.2@5733.35,4044.61 v1(5855.39,4044.61)
SPI_DO: R40.1 SD_CARD1.7 U1.31 | length 5450.8
  TopLayer w10: v1(3060,3640) 3220,3640 3255.47,3675.47 U1.31@3255.47,3810.79
  TopLayer w15: v1(3060,2990) v1(5500,2990) v1@5510,2990 ; v1(5856.46,4533.54) 5860,4530 R40.1@5980,4530
  BottomLayer w15: v1(3060,2990) v1(3060,3640) ; v1(5500,2990) 5500,4500 5533.54,4533.54 SD_CARD1.7@5733.71,4533.54 v1(5856.46,4533.54)
STA: P8.8 R58.1 U8.49 | length 1307.3
  TopLayer w15: U8.49@3781.1,986.93 3993.07,986.93 4060,920 4440,920 P8.8@4490,970 R58.1@5040,970
USB_CTRL: R23.1 U1.59 | length 2879.5
  TopLayer w10: U1.59@3692.48,4031.26 3781.26,4031.26 3830,4080 v1(3960,4080)
  TopLayer w15: v1(3960,3110) 5430,3110 5480,3160 R23.1@5560,3160
  BottomLayer w15: v1(3960,3110) 3958.74,3111.26 3958.74,3990 3960,3991.26 v1(3960,4080)
USB_D+: P3.2 R25.2 U1.71 | length 3018.3
  TopLayer w10: U1.71@3692.48,4267.48 5062.52,4267.48 5180,4150 v1(5380,4150)
  TopLayer w15: P3.2@5230,3400 5240,3400 v1(5380,3260) R25.2@5560,3260
  BottomLayer w15: v1@5370,3270 v1(5380,3260) ; v1@5380,3270 v1(5380,4150)
USB_D-: P3.3 R24.2 U1.70 | length 3600.2
  TopLayer w10: U1.70@3692.48,4247.8 5047.8,4247.8 5185.59,4110 v1(5330,4110)
  TopLayer w15: v1(5330,2910) 5660,2910 5730,2980 5880,2980 R24.2@5890,2990
  BottomLayer w15: P3.3@5230,3500 5300,3500 5330,3530 ; v1(5330,2910) 5330,3530 ; v1(5330,4110) 5330,3530
USB_DN: P4.2 U8.12 | length 2546.4
  TopLayer w15: P4.2@170,1170 401.11,1170 531.11,1040 1761.11,1040 1863.11,938 2389.11,938 2438.04,986.93 U8.12@2600,986.93
USB_DP: P4.3 U8.13 | length 2507
  TopLayer w15: P4.3@170,1070 470,1070 530,1010 1760,1010 1854,916 2398.23,916 2429.91,947.69 2599.87,947.69 U8.13@2600,947.56
USB_ID: P4.4 R53.1 | length 150
  TopLayer w15: P4.4@170,970 R53.1@320,970
USB_V: P4.1 R50.1 | length 150
  TopLayer w15: P4.1@170,1270 R50.1@320,1270
USIM_DET: P8.4 U8.53 | length 739.7
  TopLayer w15: U8.53@3781.1,1144.41 4335.59,1144.41 4360,1120 4440,1120 P8.4@4490,1170
VBAT: D1.2 U1.6 | length 1182.3
  TopLayer w10: v1(2680,4400) 2832.2,4247.8 U1.6@3094.06,4247.8
  BottomLayer w15: D1.2@2175.47,4630 2630,4630 2680,4580 v1(2680,4400)
VCC_1V8: C33.2 C34.1 P6.1 P7.5 P7.6 R51.2 R52.2 U7.2 U7.10 U8.15 | length 6228
  TopLayer w10: 3010,2000 3030,1980 3110,1980 3125.59,1995.59 U7.2@3125.59,2040 3125.59,2085.59 3150,2110 3300,2110 3330.32,2079.69 U7.10@3330.32,2040 C33.2@3440,2040
  TopLayer w15: v2(2010,870) 2028.68,851.32 2520,851.32 2538.68,870 2598.82,870 U8.15@2600,868.82 ; R52.2@4780,1270 R51.2@4780,1370
  TopLayer w20: C33.2@3440,2040 3510,2110 4520,2110 P7.6@4570,2160 P7.5@4570,2260 4663,2353 4847,2353 4910,2290 4910,1460 4820,1370 R51.2@4780,1370
  TopLayer w30: v2(3010,1780) 3010,2000 C34.1@3010,2060
  BottomLayer w30: v2(2010,870) 2010,1140 ; P6.1@2085,1215 2010,1140 ; v2(3010,1780) 2100,1780 2010,1690 2010,1140
VDD_EXT: P8.13 P10.7 U8.44 | length 2297.8
  TopLayer w15: U8.44@3781.1,790.08 3949.92,790.08 4070,670 P8.13@4390,670
  BottomLayer w15: P10.7@3100,110 3210,110 3410,310 4140,310 4220,390 4220,590 4300,670 P8.13@4390,670
VOLCHK: C22.1 R16.2 U1.15 | length 2840.3
  TopLayer w10: v1(2760,3950) 2770,3950 2890.63,4070.63 U1.15@3094.06,4070.63
  TopLayer w15: R16.2@1480,3400 1540,3400 ; C22.1@1600,3400 1540,3400 ; v1(2650,3070) 1590,3070 1540,3120 1540,3400
  BottomLayer w15: v1(2650,3070) 2650,3840 v1(2760,3950)
pads on no net: ENTER1.3 ENTER1.4 ESC1.3 ESC1.4 J2.6 JP1.0 JP1.17 JP1.18 JP4.1 JP4.6 JTAG1.11 JTAG1.17 JTAG1.19 POWKEY.3 POWKEY.4 R59.1 RIGHT1.3 RIGHT1.4 RST1.3 RST1.4 RST.3 RST.4 SD_CARD1.8 SD_CARD1.9 SD_CARD1.10 SD_CARD1.11 SD_CARD1.12 U1.5 U1.7 U1.17 U1.18 U1.23 U1.24 U1.29 U1.47 U1.48 U1.51 U1.60 U1.61 U1.62 U1.63 U1.64 U1.65 U1.66 U1.67 U1.73 U1.78 U1.79 U1.80 U1.81 U1.82 U1.83 U1.84 U1.85 U1.86 U1.87 U1.88 U1.91 U1.92 U1.93 U1.95 U1.96 U1.97 U1.98 U3. U4.5 U4.6 U4.7 U4.8 U4.9 U4.10 U4.12 U4.13 U4.14 U6.2 U6.3 U6.4 U6.5 U6.14 U6.15 U6.16 U6.17 U6.19 U6.21 U6.22 U8.27 U8.28 U8.29 U8.30 U8.31 U8.32 U8.33 U8.34 U8.35 U8.36 U8.42 U8.61 U8.83 U8.84 U8.86 U10.5 U&D1.3 U&D1.4 USB_1.4 USB_1.6 Y1.
copper on no net:
  other v4: 6630,240 250,260 200,5470 6550,5470

## Polygon pours and split planes (outlines as drawn)
GND on BottomLayer "Bottom Layer-No Net" (hatched 90Degree grid 10 track 10, remove dead copper, pour order 4): 0,5680 6780,5680 6780,10 6790,0 0,0

## Keep-outs
KeepOutLayer:
  lines w10: 6790,-1320 6800,-1330 ; 0,0 0,5680 6790,5680 6790,0 0,0

## Silkscreen, mask and mechanical layers (free items; w line width, h text height)
TopOverlay:
  drawing of 2077 lines, arcs and shapes, not listed
  text "5V" at 710,5600 h40
  text "Accel Detector V1.1" at 4580,5380 h80
  text "SPME, 2017.04" at 5190,5270 h50
  text "12V" at 30,5030 h40
  text "3V3" at 410,3880 h40
  text "GND" at 400,3730 h40
  text "GND" at 5082,3582 h30
  text "D-" at 5113,3489 h30
  text "D+" at 5115,3383 h30
  text "3V3" at 4730,3340 h40
  text "3V3" at 5095,3281 h30
  text "485_TXD" at 6275,2381 h30
  text "485_RXD" at 6269,2306 h30
  text "RT+" at 6193,2275 h30
  text "GND" at 4838,2246 h30
  text "K1" at 2178,2229 h30
  text "K3" at 2374,2229 h30
  text "K2" at 2275,2228 h30
  text "K4" at 2474,2228 h30
  text "CAN_TXD" at 6265,2224 h30
  text "RT-" at 6190,2179 h30
  text "CAN_RXD" at 6265,2149 h30
  text "GND" at 4836,2145 h30
  text "RST" at 3908,2062 h30
  text "RXD" at 4010,2062 h30
  text "DCD" at 4119,2062 h30
  text "DTR" at 4223,2062 h30
  text "3V3" at 4327,2062 h30
  text "1V8" at 4529,2062 h30
  text "BOOTCF1" at 4630,2062 h30
  text "GND" at 3902,2017 h30
  text "CTS" at 4014,2017 h30
  text "RI" at 4134,2017 h30
  text "TXD" at 4223,2017 h30
  text "3V3" at 4329,2017 h30
  text "1V8" at 4528,2017 h30
  text "BOOTCF0" at 4629,2017 h30
  text "PCM_SY" at 2238,1605 h30
  text "PCM_CLK" at 1821,1603 h30
  text "PCM_OUT" at 2237,1505 h30
  text "PCM_IN" at 1857,1503 h30
  text "GND" at 2241,1406 h30
  text "PWR_KEY" at 1818,1400 h30
  text "V" at 78,1251 h30
  text "CLK" at 2238,1205 h30
  text "1V8" at 1944,1202 h30
  text "DN" at 53,1151 h30
  text "NET" at 5213,1125 h30
  text "MO" at 2244,1104 h30
  text "MI" at 1972,1101 h30
  text "DP" at 57,1052 h30
  text "GND" at 2243,1004 h30
  text "CS" at 1968,1002 h30
  text "ID" at 71,951 h30
  text "STA" at 5213,884 h30

## Text inside footprints (layer, text, board x,y; h text height)
BAT1: BottomOverlay "+" at 1765,4470 h40
C15: TopOverlay "+" at 525,5180 h50 r180
C16: TopOverlay "+" at 525,4830 h50 r180
C17: TopOverlay "+" at 2214.21,5220 h50
C18: TopOverlay "+" at 2214.21,5500 h50
C35: TopOverlay "+" at 3675,1840 h50 r180
C46: TopOverlay "+" at 3640,335.79 h50 r270
JP1: TopOverlay "16" at 3144.72,3233.98 h40 r180; TopOverlay "1" at 3744.72,3233.98 h40 r180